# Altium PCB External_Camera_HAT.PcbDoc
Units mm, origin at the board's own origin, x right, y up, seen from the top; angles counter-clockwise.
Board outline 65 x 56 mm, 4 copper layers (Top Layer, Middle 1 Layer, Middle 2 Layer, Bottom Layer), stack 1.369 mm thick; 5 components, 0 nets, 142 pads, 0 vias.
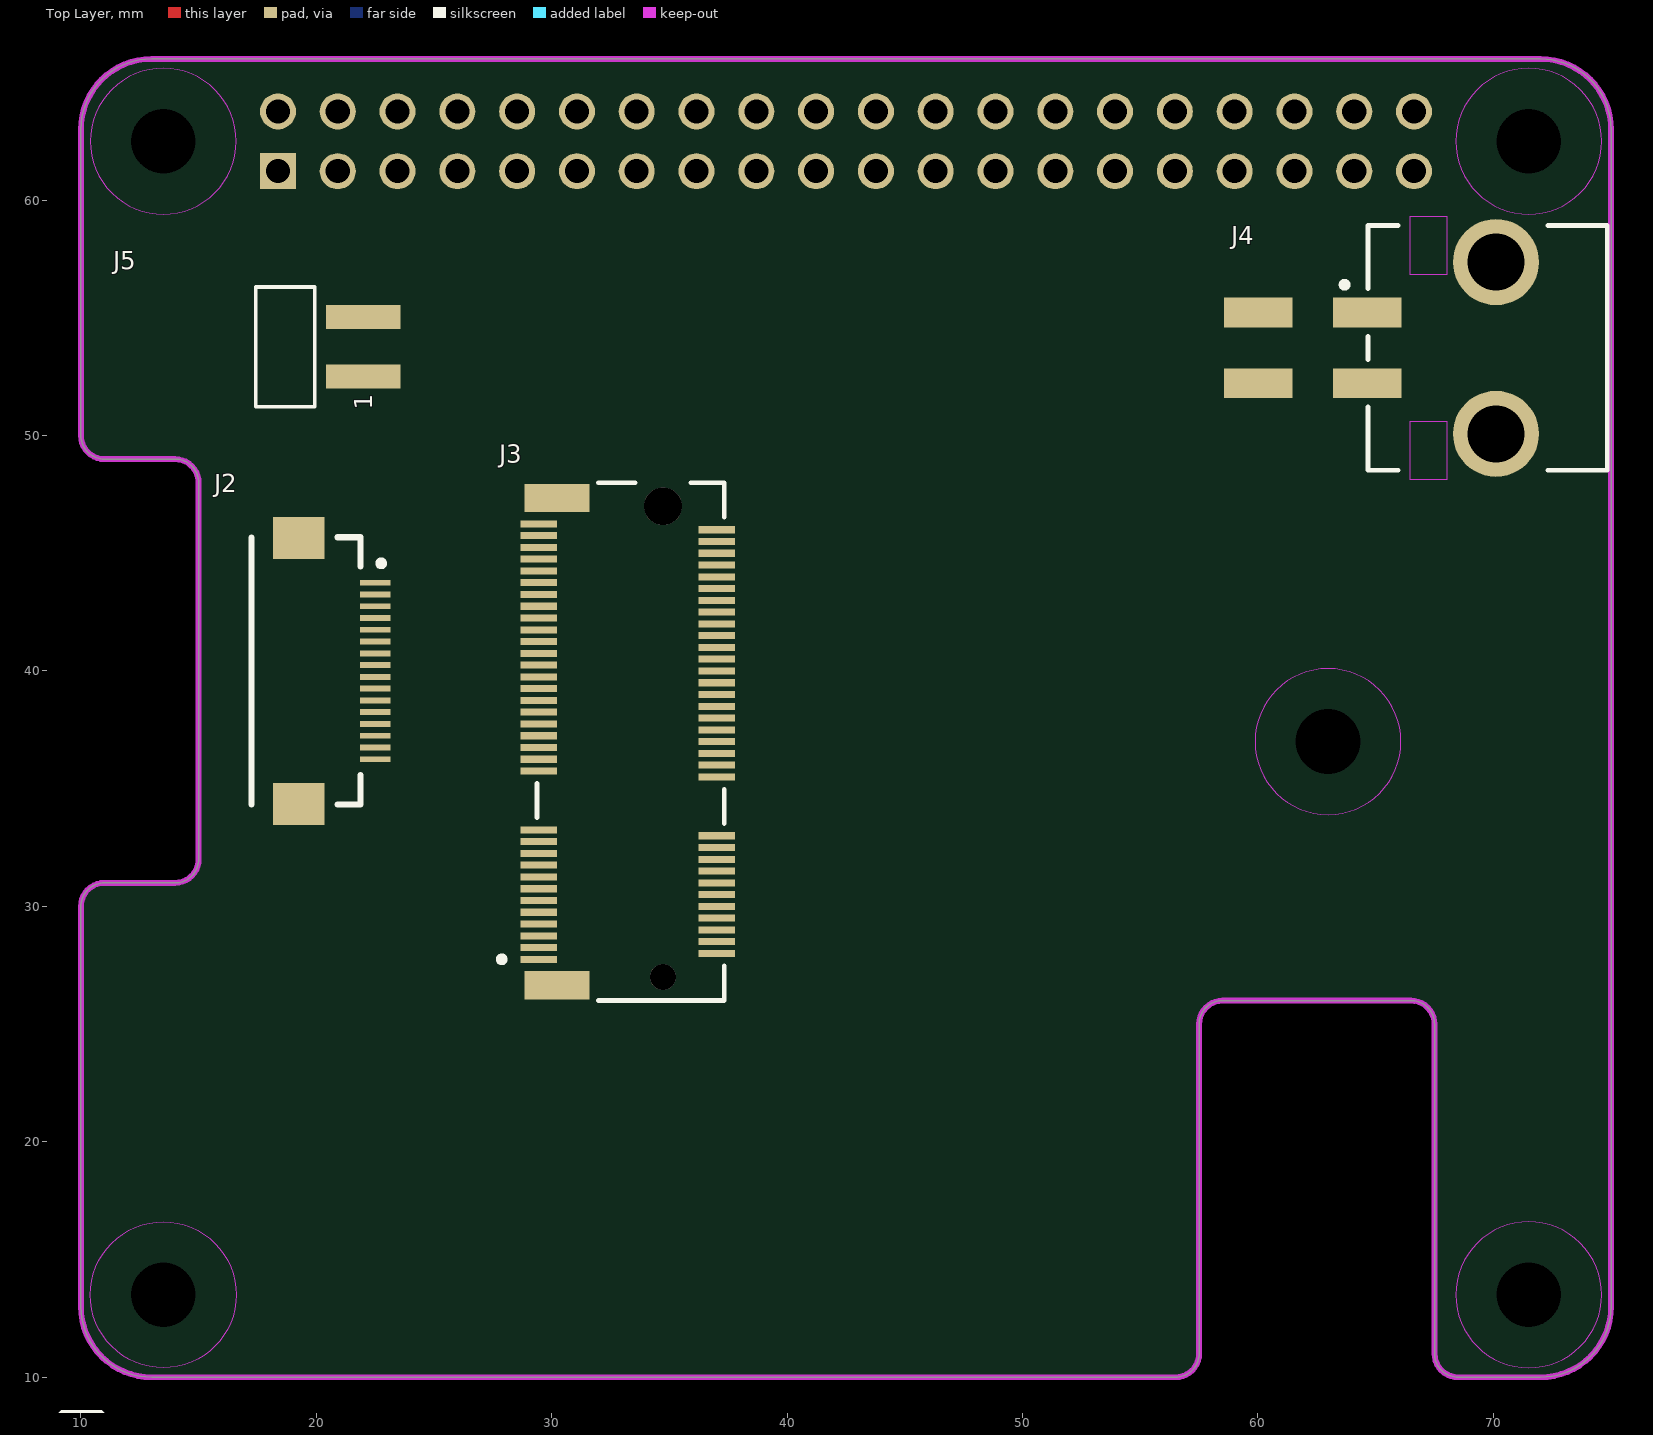
[diagram p0: Top Layer view]
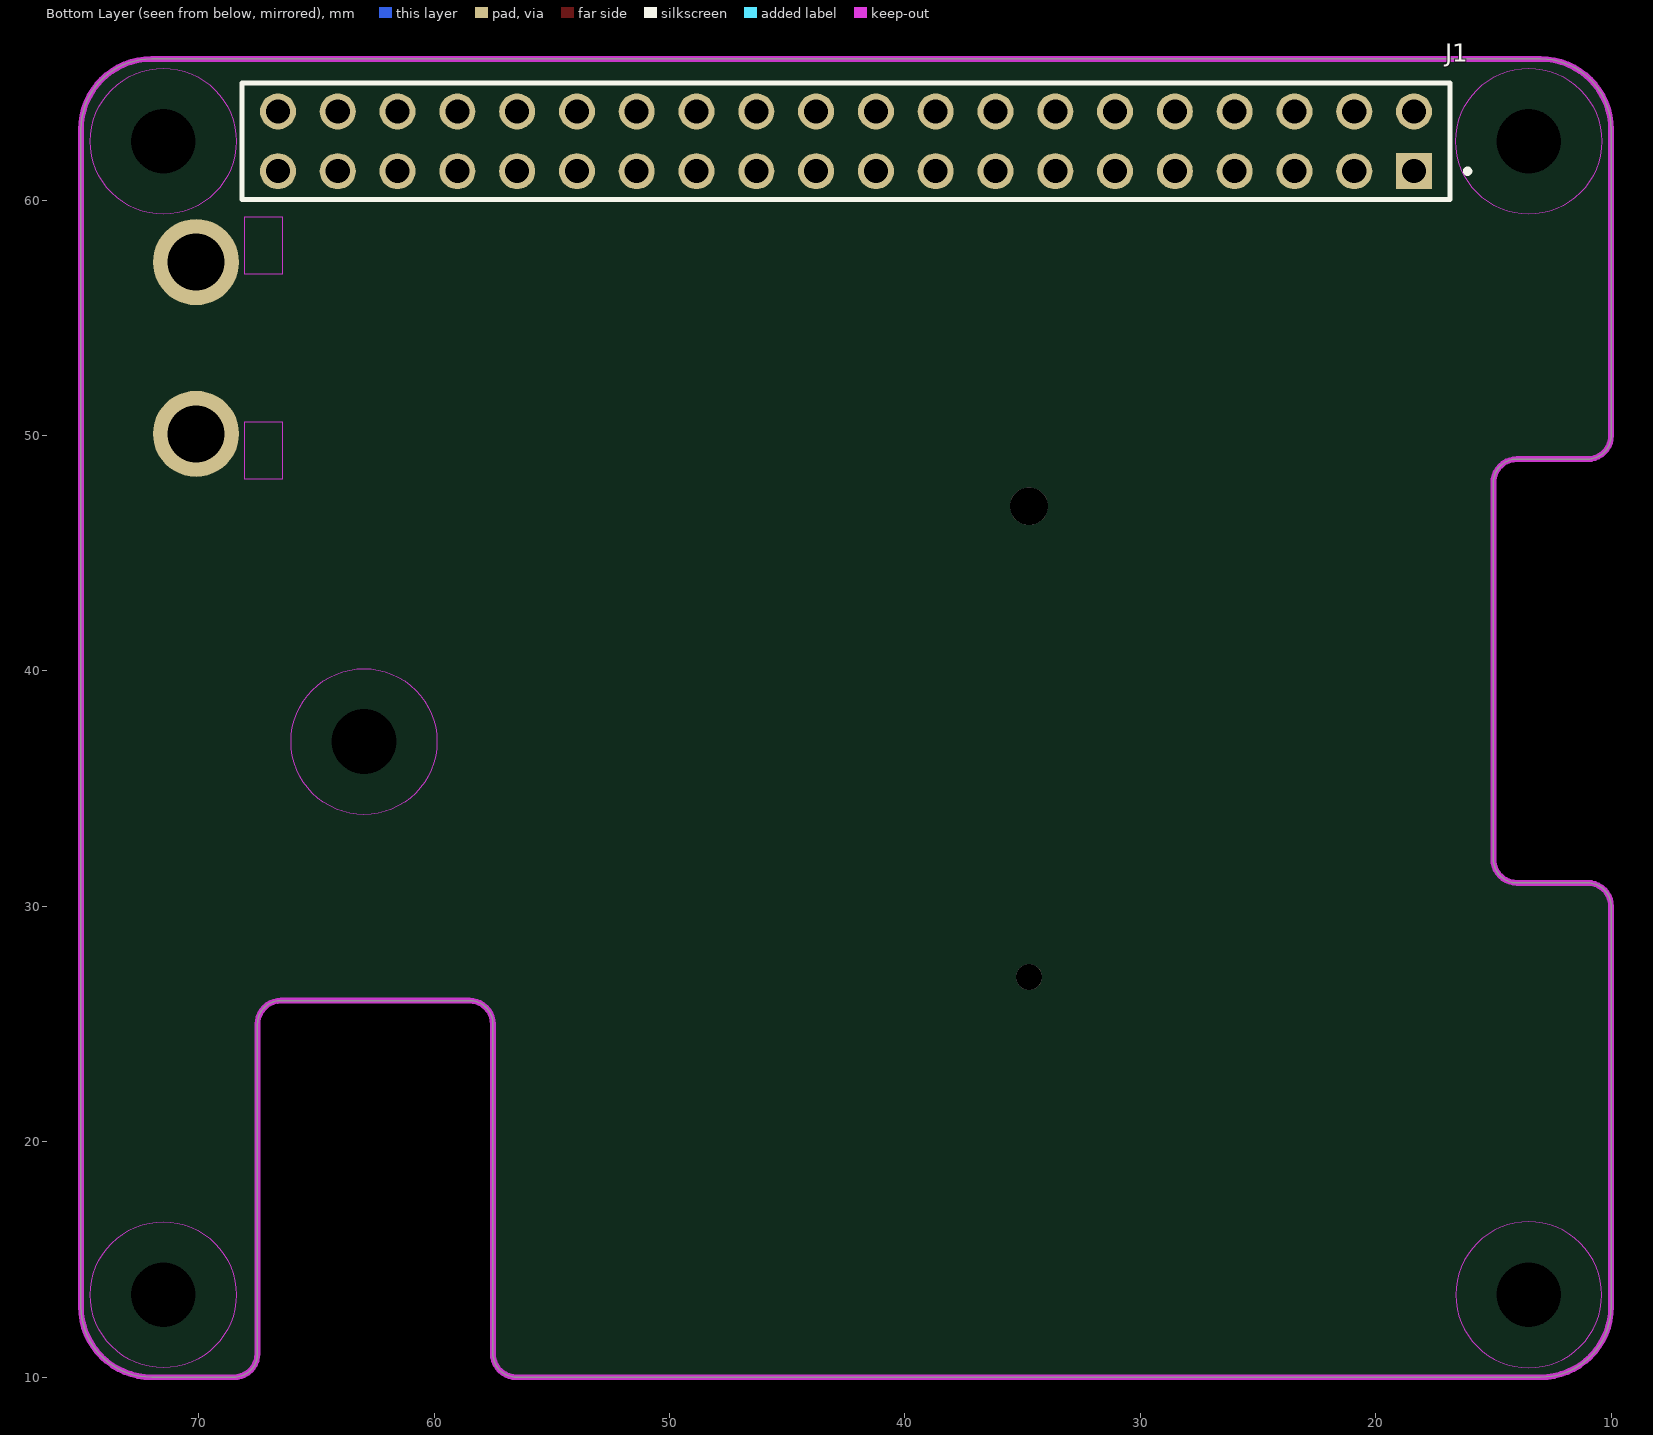
[diagram p1: Bottom Layer view, seen from below]

## Layer stack, top to bottom
Top Solder: solder mask 0.0254, SM-001, Dk 4
Top Layer: signal copper 0.035
Dielectric 1: prepreg 0.1295, PP-017, Dk 4.3
Dielectric 2: prepreg 0.1295, PP-017, Dk 4.3
Middle 1 Layer: signal copper 0.035
Dielectric 3: core 0.7112, Core-039, Dk 4.8
Middle 2 Layer: signal copper 0.035
Dielectric 4: prepreg 0.1295, PP-017, Dk 4.3
Dielectric 5: prepreg 0.1295, PP-017, Dk 4.3
Bottom Layer: signal copper 0.035
Bottom Solder: solder mask 0.0254, SM-001, Dk 4

## Board outline
13,10 cw(c13,13) 10,13 10,30 cw(c11,30) 11,31 14,31 ccw(c14,32) 15,32 15,48 ccw(c14,48) 14,49 11,49 cw(c11,50) 10,50 10,63 cw(c13,63) 13,66 72,66 cw(c72,63) 75,63 75,13 cw(c72,13) 72,10 68.5,10 cw(c68.5,11) 67.5,11 67.5,25 ccw(c66.5,25) 66.5,26 58.5,26 ccw(c58.5,25) 57.5,25 57.5,11 cw(c56.5,11) 56.5,10

## Design rules (kind name [scope] priority, off if disabled: settings)
AcuteAngle [All] p1: minimum=9.00000000000000E+0001 checktracksonly=FALSE
BoardOutlineClearance [All] p1: gap=0.381 ignorepadtopadclearanceinfootprint=FALSE
Clearance "Clearance JLCPCB" [All] p1: gap=0.152 ignorepadtopadclearanceinfootprint=FALSE except(0.127: SMDPad-SMDPad; 0.254: Arc-Via Arc-Hole Track-Via Track-Hole Via-Via Via-Fill Via-Poly Via-Region Fill-Hole Poly-Hole Region-Hole; 0.33: Arc-THPad Track-THPad THPad-Fill THPad-Poly THPad-Region; 0.508: THPad-THPad)
ComponentOrientations [All] p1: allowedrotations=32
DiffPairsRouting CAN [All] p1: maxlimit=0.254 minlimit=0.203 mostfreqgap=0.254 toplayer_maxgap=0.203 toplayer_prefgap=0.203 toplayer_minwidth=0.203 toplayer_maxwidth=0.203 toplayer_prefwidth=0.203 midlayer1_minwidth=0.381 midlayer1_maxwidth=0.381 midlayer1_prefwidth=0.381 midlayer2_minwidth=0.381 midlayer2_maxwidth=0.381 midlayer2_prefwidth=0.381 bottomlayer_maxgap=0.203 bottomlayer_prefgap=0.203 bottomlayer_minwidth=0.203 bottomlayer_maxwidth=0.203 bottomlayer_prefwidth=0.203 impedanceprofiledriven=TRUE maxuncoupledlength=12.7
DiffPairsRouting "USB 2.0" [InDifferentialPairClass('USB 2.0')] p2: maxlimit=0.152 minlimit=0.152 mostfreqgap=0.152 toplayer_minwidth=0.381 toplayer_maxwidth=0.381 toplayer_prefwidth=0.381 midlayer1_minwidth=0.064 midlayer1_maxwidth=0.064 midlayer1_prefwidth=0.064 midlayer2_minwidth=0.064 midlayer2_maxwidth=0.064 midlayer2_prefwidth=0.064 bottomlayer_minwidth=0.381 bottomlayer_maxwidth=0.381 bottomlayer_prefwidth=0.381 maxuncoupledlength=12.7
DiffPairsRouting ETH [All] p3 off: maxlimit=0.254 minlimit=0.102 mostfreqgap=0.254 toplayer_maxgap=0.102 toplayer_prefgap=0.102 toplayer_minwidth=0.203 toplayer_maxwidth=0.203 toplayer_prefwidth=0.203 midlayer1_minwidth=0.381 midlayer1_maxwidth=0.381 midlayer1_prefwidth=0.381 midlayer2_minwidth=0.381 midlayer2_maxwidth=0.381 midlayer2_prefwidth=0.381 bottomlayer_maxgap=0.102 bottomlayer_prefgap=0.102 bottomlayer_minwidth=0.203 bottomlayer_maxwidth=0.203 bottomlayer_prefwidth=0.203 impedanceprofiledriven=TRUE maxuncoupledlength=12.7
FanoutControl Fanout_Default [All] p5: bgadir=Out bgaviamode=Centered fanoutstyle=Auto fanoutdirection=OutOnly viagrid=0.025 // Fanout_Default (Default Rule)
HoleSize "HoleSize JLCPCB" [All] p1: absolutevalues=TRUE maxlimit=6.223 minlimit=0.203 maxpercent=80.000 minpercent=20.000
HoleToHoleClearance "HoleToHoleClearance JLCPCB" [All] p1: gap=0.508 allowstackedmicrovias=TRUE
MinimumAnnularRing "MinimumAnnularRing JLCPCB" [All] p1: minimumring=0.152
MinimumSolderMaskSliver "MinimumSolderMaskSliver JLCPCB" [All] p1: minsoldermaskwidth=0.254
PasteMaskExpansion [All] p1: expansion=0.025
PolygonConnect [All] p1: connectstyle=Relief reliefconductorwidth=0.254 reliefentries=4 polygonreliefangle="90 Angle" airgapwidth=0.254
RoutingLayers [All] p1: top layer_v5=TRUE mid layer 1_v5=FALSE mid layer 2_v5=FALSE bottom layer_v5=TRUE
RoutingVias "RoutingVias JLCPCB" [All] p1: holewidth=0.254 width=0.559 viastyle="Through Hole" minholewidth=0.203 minwidth=0.508 maxholewidth=0.711 maxwidth=1.016
SMDEntry [All] p1: side=TRUE corner=TRUE anyangle=FALSE
SMDToCorner [All] p1: distance=0
SMDToPlane [All] p1: distance=0
SilkToSilkClearance "SilkToSilkClearance JLCPCB" [All] p1: silktosilkclearance=0.254
SilkToSolderMaskClearance "SilkToSolderMaskClearance JLCPCB" [IsPad] p1: minsilkscreentomaskgap=0.152 clearancetoexposedcopper=TRUE
SolderMaskExpansion [All] p1: expansion=0.102 istentingtop=FALSE
UnRoutedNet [All] p1: checkbadconnections=TRUE
Width "Width JLCPCB" [All] p1: maxlimit=2.54 minlimit=0.152 preferedwidth=0.254
20 further rules are at their usual default settings.

## Components (designator, comment, footprint, x,y, rotation, side; value= is the part's Value field where it differs from the comment)
J1 "ESQ-120-XX-X-D-XX" SAMTEC_ESQ-120-XX-X-D-XX 42.5,62.5 r180 bottom locked
J2 "FFC 0.5MM TOP R/A" FH12A-16S-0.5SH(55) 22.5,40 r90 top locked
J3 "2199230-4" FP-2199230-4-MFG 33.35,37 r90 top
J4 "43045-0406" FP-43045-0406-MFG 69.756,53.721 r90 top
J5 "HEADER R/A 2.54MM" HEADER_2PIN_2.54MM_R/A 22,52.5 r90 top

## Footprints (in the part's own frame and the unit in brackets; to place one, negate y for a bottom-side part, rotate by r counter-clockwise, add the part's x,y. Pads: shape width x height; smd on the part's side, far side on the other; paste and mask are expansions set on the pad)
FH12A-16S-0.5SH(55) [mm]
  rect 0.25x1.3 smd mask+0.025: 1(3.75,0) 2(3.25,0) 3(2.75,0) 4(2.25,0) 5(1.75,0) 6(1.25,0) 7(0.75,0) 8(0.25,0) 9(-0.25,0) 10(-0.75,0) 11(-1.25,0) 12(-1.75,0) 13(-2.25,0) 14(-2.75,0) 15(-3.25,0) 16(-3.75,0)
  rect 1.8x2.2 smd: S1(5.65,3.25) S2(-5.65,3.25)
  silkscreen extent -5.68,-0.38 5.68,5.25, body extent -6.25,-0.25 6.25,6.75, height 2.05
FP-43045-0406-MFG [mm]
  rect 1.27x2.92 smd paste+0 mask+0: 1(1.5,5.115) 2(-1.5,5.115) 3(1.5,9.745) 4(-1.5,9.745)
  round 3.66 hole 2.41 paste-1000 mask+0: 5(-3.65,-0.355) 6(3.65,-0.355)
  Keep-Out Layer region: -5.575,1.705 -3.125,1.705 -3.125,3.305 -5.575,3.305
  Keep-Out Layer region: 3.125,1.705 5.575,1.705 5.575,3.305 3.125,3.305
  silkscreen extent -5.2,-5.08 5.2,6.2, body extent -5.58,-5.18 5.58,11.3, height 0.25
FP-2199230-4-MFG [mm]
  rect 0.3x1.55 smd paste+0 mask+0: 1(-9.25,3.9) 2(-9,-3.65) 3(-8.75,3.9) 4(-8.5,-3.65) 5(-8.25,3.9) 6(-8,-3.65) 7(-7.75,3.9) 8(-7.5,-3.65) 9(-7.25,3.9) 10(-7,-3.65) 11(-6.75,3.9) 12(-6.5,-3.65) 13(-6.25,3.9) 14(-6,-3.65) 15(-5.75,3.9) 16(-5.5,-3.65) 17(-5.25,3.9) 18(-5,-3.65) 19(-4.75,3.9) 20(-4.5,-3.65) 21(-4.25,3.9) 22(-4,-3.65) 23(-3.75,3.9) 32(-1.5,-3.65) 33(-1.25,3.9) 34(-1,-3.65) 35(-0.75,3.9) 36(-0.5,-3.65) 37(-0.25,3.9) 38(0,-3.65) 39(0.25,3.9) 40(0.5,-3.65) 41(0.75,3.9) 42(1,-3.65) 43(1.25,3.9) 44(1.5,-3.65) 45(1.75,3.9) 46(2,-3.65) 47(2.25,3.9) 48(2.5,-3.65) 49(2.75,3.9) 50(3,-3.65) 51(3.25,3.9) 52(3.5,-3.65) 53(3.75,3.9) 54(4,-3.65) 55(4.25,3.9) 56(4.5,-3.65) 57(4.75,3.9) 58(5,-3.65) 59(5.25,3.9) 60(5.5,-3.65) 61(5.75,3.9) 62(6,-3.65) 63(6.25,3.9) 64(6.5,-3.65) 65(6.75,3.9) 66(7,-3.65) 67(7.25,3.9) 68(7.5,-3.65) 69(7.75,3.9) 70(8,-3.65) 71(8.25,3.9) 72(8.5,-3.65) 73(8.75,3.9) 74(9,-3.65) 75(9.25,3.9)
  rect 1.2x2.75 smd paste+0 mask+0: 76(-10.35,3.125) 77(10.35,3.125)
  round 1.1 hole 1.1 unplated paste-1000 mask+0: ""(-10,-1.375)
  round 1.6 hole 1.6 unplated paste-1000 mask+0: ""(10,-1.375)
  silkscreen extent -11,-3.98 11,5.6, body extent -11.1,-4.52 11.1,4.77, height 0.25
HEADER_2PIN_2.54MM_R/A [mm]
  rect 1.02x3.17 smd: 1(0,0) 2(2.54,0)
  silkscreen extent -1.27,2.07 3.81,4.57, body extent -1.27,-0.94 3.81,10.55, height 2.51
SAMTEC_ESQ-120-XX-X-D-XX [mm]
  rect 1.53x1.53 / inner round 1.53 / far side rect 1.53x1.53 hole 1.02: 01(24.13,-1.27)
  round 1.53 hole 1.02: 02(24.13,1.27) 03(21.59,-1.27) 04(21.59,1.27) 05(19.05,-1.27) 06(19.05,1.27) 07(16.51,-1.27) 08(16.51,1.27) 09(13.97,-1.27) 10(13.97,1.27) 11(11.43,-1.27) 12(11.43,1.27) 13(8.89,-1.27) 14(8.89,1.27) 15(6.35,-1.27) 16(6.35,1.27) 17(3.81,-1.27) 18(3.81,1.27) 19(1.27,-1.27) 20(1.27,1.27) 21(-1.27,-1.27) 22(-1.27,1.27) 23(-3.81,-1.27) 24(-3.81,1.27) 25(-6.35,-1.27) 26(-6.35,1.27) 27(-8.89,-1.27) 28(-8.89,1.27) 29(-11.43,-1.27) 30(-11.43,1.27) 31(-13.97,-1.27) 32(-13.97,1.27) 33(-16.51,-1.27) 34(-16.51,1.27) 35(-19.05,-1.27) 36(-19.05,1.27) 37(-21.59,-1.27) 38(-21.59,1.27) 39(-24.13,-1.27) 40(-24.13,1.27)
  silkscreen extent -25.66,-2.47 26.5,2.47, body extent -25.65,-2.54 25.65,2.54, height 16.14

## Part data
J1: "ESQ - Samtec 2.54mm Elevated Dual Row Socket Strip 7.36mm Contact. 11.05mm Profile (13)", Package=None, Availability="In Stock", Check_prices=https://www.snapeda.com/parts/ESQ-120-13-L-D/Samtec+Inc./view-part/?ref=eda, MF=Samtec, MP=ESQ-120-13-L-D, Price=None, Purchase-URL=https://pricing.snapeda.com/search/part/ESQ-120-13-L-D/?ref=eda, SnapEDA_Link=https://www.snapeda.com/parts/ESQ-120-13-L-D/Samtec+Inc./view-part/?ref=snap
J2: library part FFC_16POS_0.5MM_R/A_TOP, "16 Position FPC Connector Contacts, Top 0.02\" (0.5mm) Surface Mount, Right Angle, Gold Contacts", Max Current=0.5A, Supplier Part Number 1=HFK116CT-ND, Contact Plating=Gold, FFC Type="ZIF Locking", Made By="Robert Pafford", Orientation="Top R/A", Pin Count=16, Supplier 1=Digi-Key
J3: library part CMP-03365-000002-1, "CONN FEMALE 67POS 0.020 GOLD", Current Rating=0.5A, Manufacturer="TE Connectivity", Package=0, Temperature="-40°C to +80°C", Temperature Range High=+80°C, Temperature Range Low=-40°C, Voltage Rating=50V, Automotive=No, Category=Conn, ComponentLink2Description=Datasheet, ComponentLink2URL=https://www.te.com/commerce/DocumentDelivery/DDEController?Action=showdoc&DocId=Customer+Drawing%7F2199230%7FB3%7Fpdf%7FEnglish%7FENG_CD_2199230_B3.pdf%7F2199230-4, Conn Gender=Female, Conn Orientation="Right Angle", Contact Material=Gold,Nickel, Device Class L1=Connectors, Device Class L2="Card Edge Connectors", Device Class L3=unset, Digikey Description="CONN FEMALE 67POS 0.020 GOLD", Height=4.2mm, Is Female=yes, Lead Free=Yes, Manufacturer Part Number=2199230-4, Mouser Description="PCI Express / PCI Connectors .5PITCH 4.2H KEY E EMBOSS NGFF MINICARD", Number of Contacts=67, Number Of Rows=2, Octopart=https://octopart.com/2199230-4-te+connectivity-46436156, Pitch=0.5mm, RoHS=TRUE
J4: library part CMP-04776-000244-1, "CONN HEADER SMD R/A 4POS 3MM", Case/Package=0406, Color=Black, Contact Resistance=10mR, Current Rating=5A, Flammability Rating="UL94 V-0", Max Operating Temperature=105°C, Max Voltage Rating (DC)=250.25kV, Min Operating Temperature=-40°C, Package Quantity=1800, Voltage Rating=600V, Voltage Rating (DC)=250V, Contact Material=Brass, Contact Plating=Tin, Gender=Male, Glow Wire Compliant=Compliant, Halogen Free="Low Halogen", Housing Material=Thermoplastic, Mount="Surface Mount", Number of Circuits=4, Number of Contacts=4, Number of Positions=4, Number Of Rows=2, Orientation="Right Angle", Packaging="Tape and Reel", Pitch=3mm, RoHS Compliant=Yes, Row Spacing=3mm, Series="Micro-Fit 3.0", Termination=SMD/SMT
J5: library part HEADER_2PIN_2.54MM_R/A, "CONN HEADER R/A 2POS 2.54MM", Current Per Pin=3A, Supplier Part Number 1=952-M20-8890245RCT-ND, Configuration=R/A, Created By="Robert P", Number of Positions=2, Pitch=2.54mm, Plating=Gold, Supplier 1=Digi-Key

## Free pads (board coordinates)
  round 1 hole 2.75 unplated: 1(13.5,13.5) 1(13.5,62.5) 1(62.975,37) 1(71.5,13.5) 1(71.5,62.5)

## Nets (pads, with @x,y where several pads share a name; then routed paths per layer and width w, separated by ;. In a path a pad name is that pad's centre, name@x,y a point inside that pad or via, vN(x,y) a via of type N, cw(c..) or ccw(c..) an arc to the next point about the centre after c; other vN are vias at no path point)
pads on no net: J1.01 J1.02 J1.03 J1.04 J1.05 J1.06 J1.07 J1.08 J1.09 J1.10 J1.11 J1.12 J1.13 J1.14 J1.15 J1.16 J1.17 J1.18 J1.19 J1.20 J1.21 J1.22 J1.23 J1.24 J1.25 J1.26 J1.27 J1.28 J1.29 J1.30 J1.31 J1.32 J1.33 J1.34 J1.35 J1.36 J1.37 J1.38 J1.39 J1.40 J2.1 J2.2 J2.3 J2.4 J2.5 J2.6 J2.7 J2.8 J2.9 J2.10 J2.11 J2.12 J2.13 J2.14 J2.15 J2.16 J2.S1 J2.S2 J3. J3.1 J3.2 J3.3 J3.4 J3.5 J3.6 J3.7 J3.8 J3.9 J3.10 J3.11 J3.12 J3.13 J3.14 J3.15 J3.16 J3.17 J3.18 J3.19 J3.20 J3.21 J3.22 J3.23 J3.32 J3.33 J3.34 J3.35 J3.36 J3.37 J3.38 J3.39 J3.40 J3.41 J3.42 J3.43 J3.44 J3.45 J3.46 J3.47 J3.48 J3.49 J3.50 J3.51 J3.52 J3.53 J3.54 J3.55 J3.56 J3.57 J3.58 J3.59 J3.60 J3.61 J3.62 J3.63 J3.64 J3.65 J3.66 J3.67 J3.68 J3.69 J3.70 J3.71 J3.72 J3.73 J3.74 J3.75 J3.76 J3.77 J4.1 J4.2 J4.3 J4.4 J4.5 J4.6 J5.1 J5.2

## Keep-outs
Keep-Out Layer:
  region: 62.975,33.9 ccw(c62.975,37) 66.075,37 ccw(c62.975,37) 62.975,40.1 ccw(c62.975,37) 59.875,37 ccw(c62.975,37)
  region: 71.5,59.4 ccw(c71.5,62.5) 74.6,62.5 ccw(c71.5,62.5) 71.5,65.6 ccw(c71.5,62.5) 68.4,62.5 ccw(c71.5,62.5)
  region: 13.5,65.6 ccw(c13.5,62.5) 10.4,62.5 ccw(c13.5,62.5) 13.5,59.4 ccw(c13.5,62.5) 16.6,62.5 ccw(c13.5,62.5)
  region: 71.5,10.4 ccw(c71.5,13.5) 74.6,13.5 ccw(c71.5,13.5) 71.5,16.6 ccw(c71.5,13.5) 68.4,13.5 ccw(c71.5,13.5)
  region: 13.5,10.4 cw(c13.5,13.5) 10.4,13.5 cw(c13.5,13.5) 13.5,16.6 cw(c13.5,13.5) 16.6,13.5 cw(c13.5,13.5)
  lines w0.25: 10,13 ccw(c13,13) 13,10 56.5,10 ccw(c56.5,11) 57.5,11 57.5,25 cw(c58.5,25) 58.5,26 66.5,26 cw(c66.5,25) 67.5,25 67.5,11 ccw(c68.5,11) 68.5,10 72,10 ccw(c72,13) 75,13 75,63 ccw(c72,63) 72,66 13,66 ccw(c13,63) 10,63 10,50 ccw(c11,50) 11,49 14,49 cw(c14,48) 15,48 15,32 cw(c14,32) 14,31 11,31 ccw(c11,30) 10,30 10,13

## Silkscreen, mask and mechanical layers (free items; w line width, h text height)
Top Overlay:
  drawing of 19 lines, arcs and shapes, not listed
  text "The Underwater Robotics Team" at 20.219,3.969 h1.52
  text "'.ProjectTitle'" at 20.219,0.794 h1.52

## Text inside footprints (layer, text, board x,y; h text height)
J5: Top Overlay "1" at 22.381,51.103 h0.76 r90